# Altium PCB Brake_PCB.PcbDoc
Units mm, origin at the board's own origin, x right, y up, seen from the top; angles counter-clockwise.
Board outline 86.5 x 99 mm, 2 copper layers (Top Layer, Bottom Layer); 48 components, 47 nets, 244 pads, 44 vias.
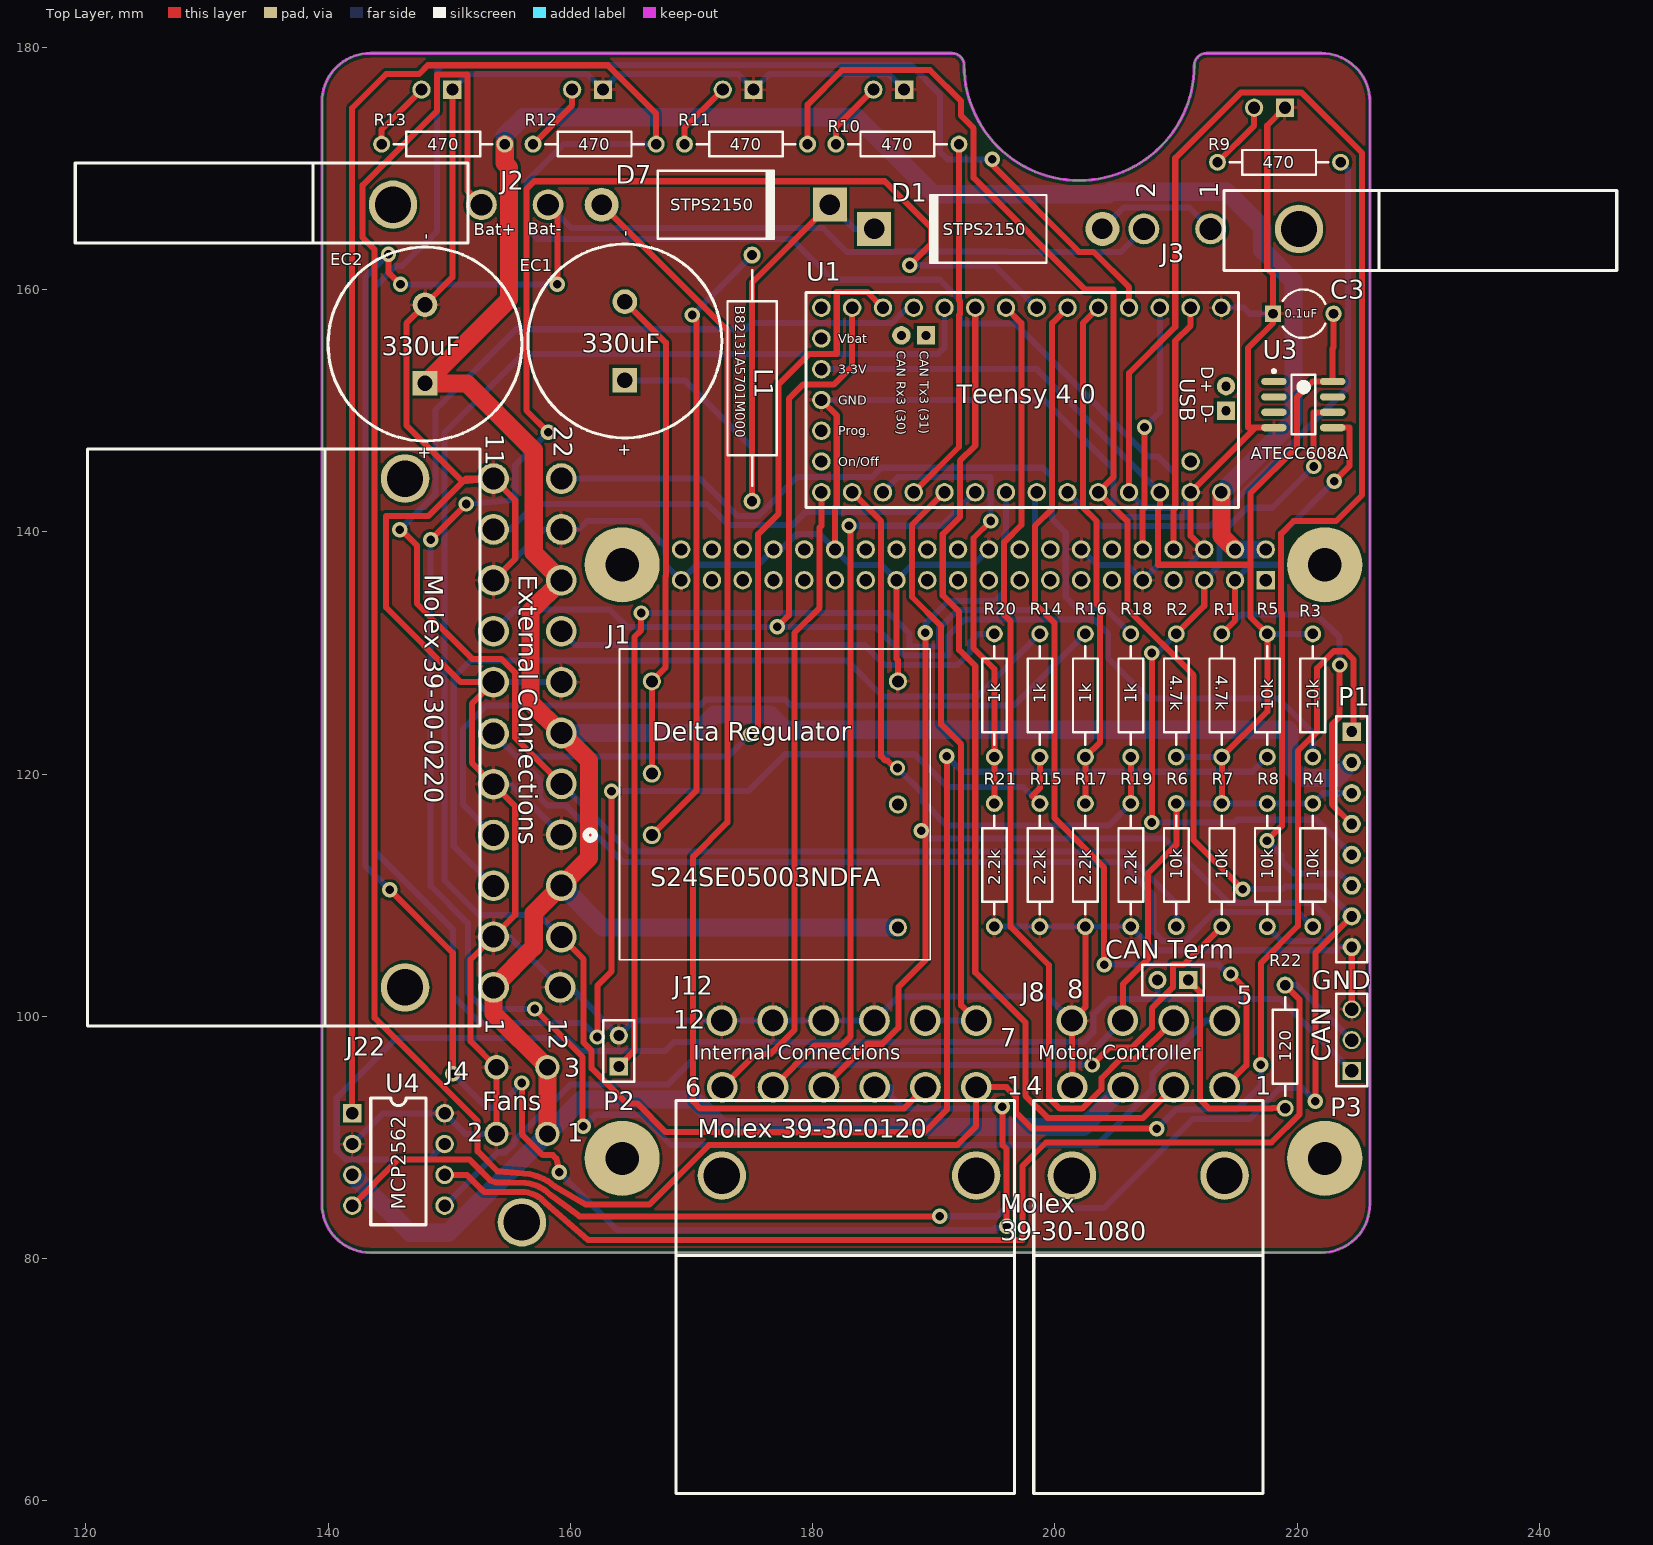
[diagram p0: Top Layer view]
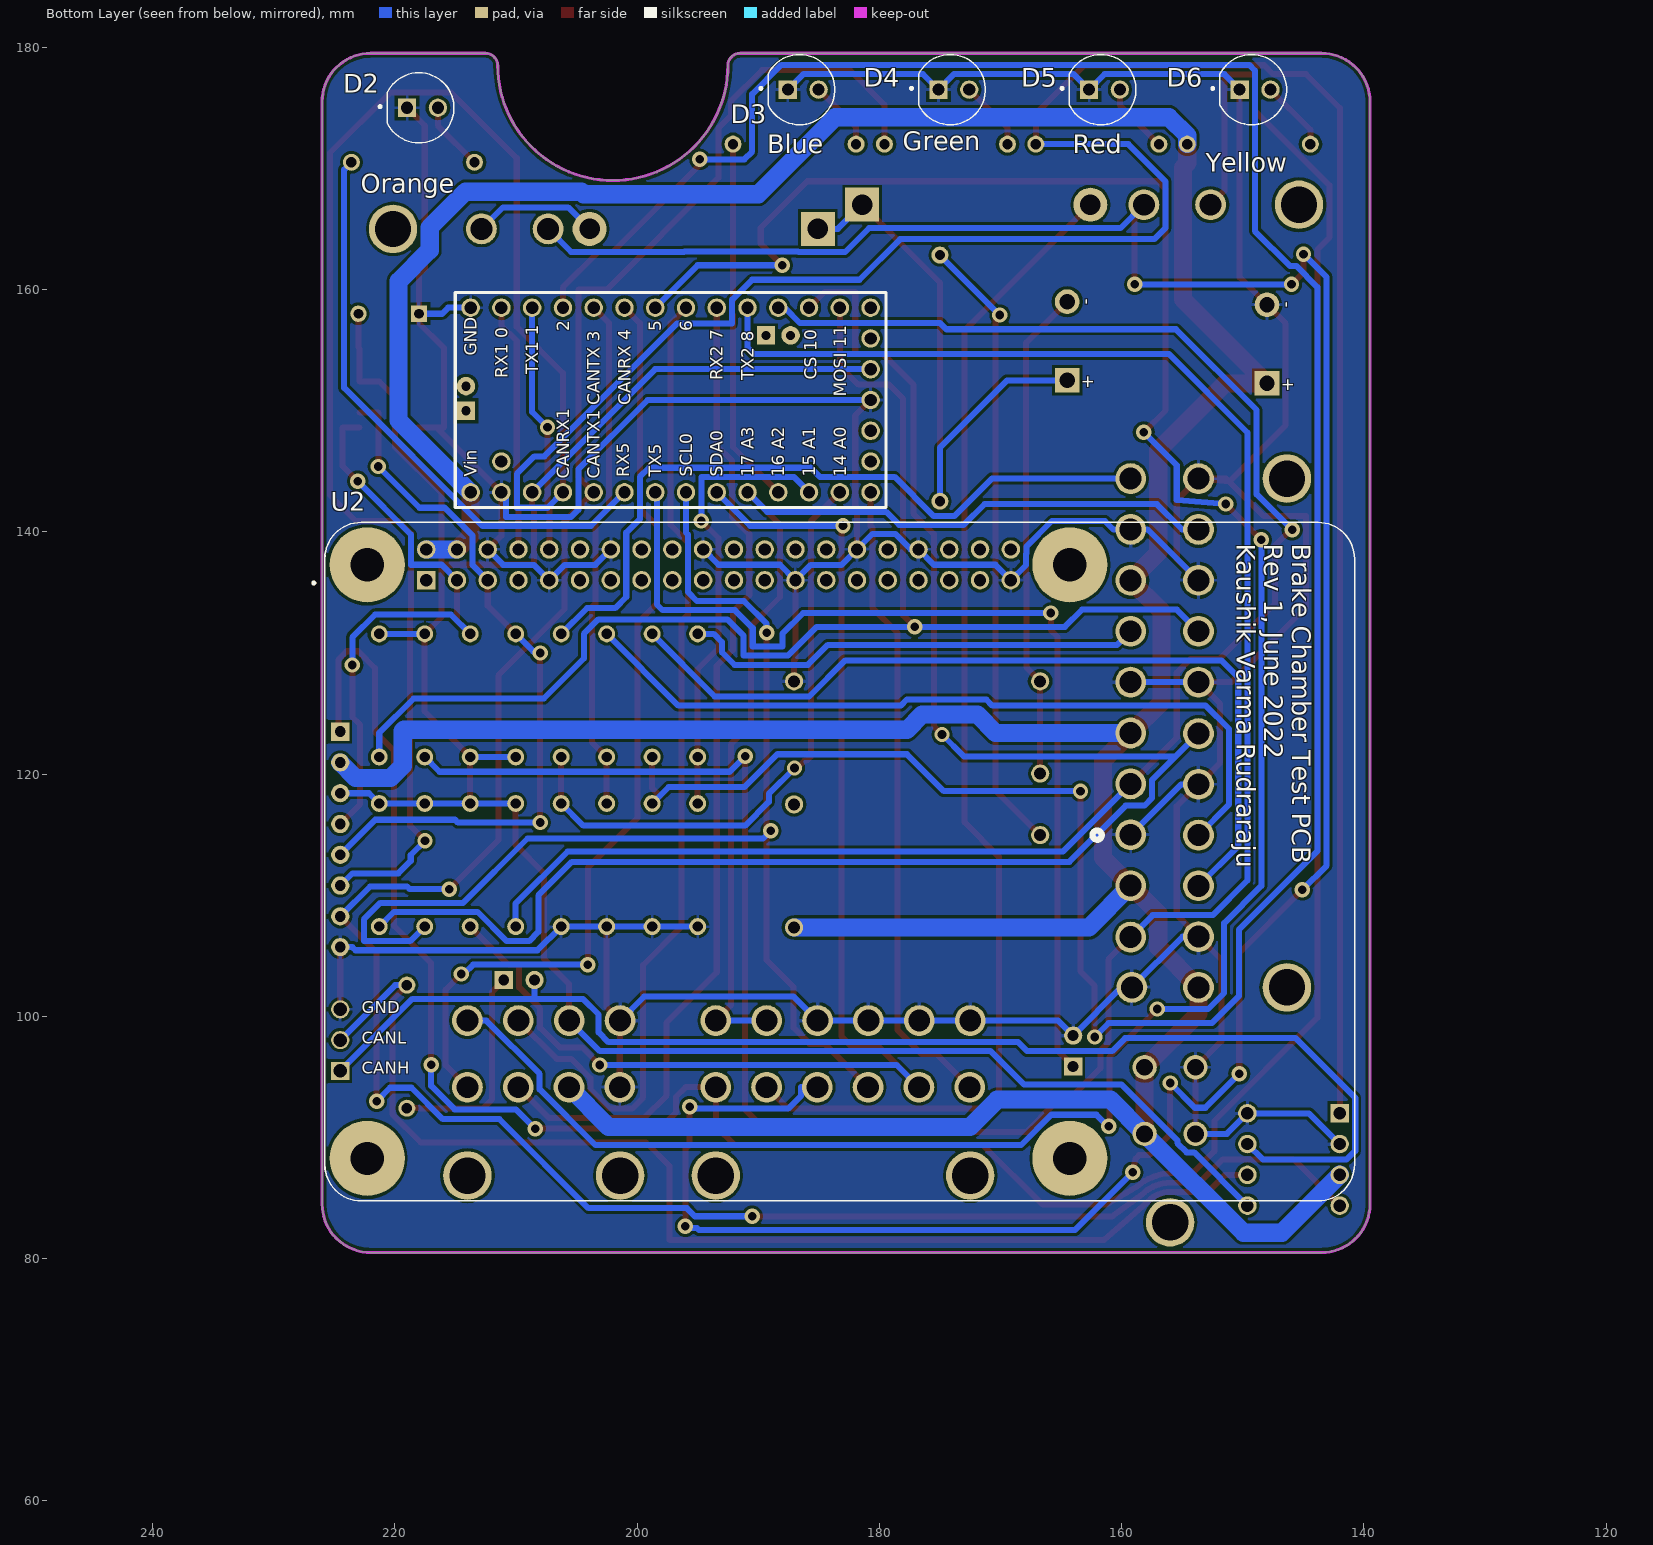
[diagram p1: Bottom Layer view, seen from below]

## Layer stack, top to bottom
Top Solder: solder mask 0.0102, Solder Resist, Dk 3.5
Top Layer: signal copper 0.0356
Dielectric 1: dielectric 0.32, FR-4, Dk 4.8
Bottom Layer: signal copper 0.0356
Bottom Solder: solder mask 0.0102, Solder Resist, Dk 3.5

## Board outline
139.5,84.5 139.5,175.5 cw(c143.5,175.5) 143.5,179.5 191.5,179.5 cw(c191.5,178.5) 192.5,178.5 ccw(c202,178.5) 211.5,178.5 cw(c212.5,178.5) 212.5,179.5 222,179.5 cw(c222,175.5) 226,175.5 226,84.504 225.996,84.504 cw(c221.996,84.504) 221.996,80.504 221.996,80.5 143.5,80.5 cw(c143.5,84.5)

## Design rules (kind name [scope] priority, off if disabled: settings)
Clearance [All] p1: gap=0.254 ignorepadtopadclearanceinfootprint=FALSE except(0: Arc-Hole Track-Hole SMDPad-Hole THPad-Hole Via-Hole Fill-Hole Poly-Hole Region-Hole Text-Hole)
PolygonConnect [All] p1: connectstyle=Relief reliefconductorwidth=0.254 reliefentries=4 polygonreliefangle="90 Angle" airgapwidth=0.254
RoutingVias [All] p1: holewidth=0.711 width=1.27 viastyle="Through Hole" minholewidth=0.711 minwidth=1.27 maxholewidth=0.711 maxwidth=1.27
SolderMaskExpansion [All] p1: expansion=0.102 istentingtop=FALSE
Width 5V [InNet('5V')] p1: maxlimit=2 minlimit=0.254 preferedwidth=1.5 minimp=50.000000 maximp=50.000000 favimp=50.000000
Width [All] p2: maxlimit=0.75 minlimit=0.4 preferedwidth=0.5 minimp=50.000000 maximp=50.000000 favimp=50.000000
30 further rules are at their usual default settings.

## Components (designator, comment, footprint, x,y, rotation, side; value= is the part's Value field where it differs from the comment)
C3 "0.1uF" CAPR5-4X5 220.5,158 r0 top
"CAN Term" "Header 2" HDR1X2 211,103 r180 top
D1 "STPS2150" DO-201AD 194.5,165 r180 top
D2 "Orange" LED_151054RS03000 217.715,175 r180 bottom
D3 "Blue" LED_151054RS03000 186.282,176.5 r180 bottom
D4 "Green" LED_151054RS03000 173.85,176.5 r180 bottom
D5 "Red" LED_151054RS03000 161.417,176.5 r180 bottom
D6 "Yellow" LED_151054RS03000 148.985,176.5 r180 bottom
D7 "STPS2150" DO-201AD 172,167 r0 top
EC1 "330uF" "Cap - 15mm Polarized" 164.5,155.75 r90 top
EC2 "330uF" "Cap - 15mm Polarized" 148,155.5 r90 top
J1 "S24SE05003NDFA" CONN6_3NDFA_DEA 166.723,114.96 r0 top
J2 "Battery Power" "2 pos Mini-Fit Jr. R/A Header" 152.66,167 r270 top
J3 "Motor Power" "2 pos Mini-Fit Jr. R/A Header" 212.845,165 r90 top
J4 "Fans" "4 POS MINI-FIT JR" 158.1,90.3 r0 top
J8 "Motor Controller" "8 pos Mini-Fit Jr. R/A Header" 214,94.155 r0 top
J12 "Internal Connections" "12 pos Mini-Fit Jr. R/A Header" 193.5,94.155 r0 top
J22 "External Connections" "22 pos Mini-Fit Jr. R/A Header" 153.655,102.391 r270 top
L1 "B82131A5701M000" AXIAL-0.8 175,152.684 r270 top
P1 "Header 8" HDR1X8 224.5,123.5 r270 top
P2 "Header 2" HDR1X2 164,95.87 r90 top
P3 "Header 3" HDR1X3 224.5,95.5 r90 top
R1 "4.7k" AXIAL-0.4 213.773,126.494 r270 top value=10K
R2 "4.7k" AXIAL-0.4 210.019,126.494 r270 top value=10K
R3 "10k" AXIAL-0.4 221.283,126.494 r90 top value="10 K"
R4 "10k" AXIAL-0.4 221.283,112.494 r90 top value="10 K"
R5 "10k" AXIAL-0.4 217.528,126.494 r90 top value="10 K"
R6 "10k" AXIAL-0.4 210.019,112.494 r90 top value="10 K"
R7 "10k" AXIAL-0.4 213.773,112.494 r90 top value="10 K"
R8 "10k" AXIAL-0.4 217.528,112.494 r90 top value="10 K"
R9 "470" AXIAL-0.4 218.5,170.5 r0 top value="470 R"
R10 "470" AXIAL-0.4 187,172 r0 top value="470 R"
R11 "470" AXIAL-0.4 174.5,172 r0 top value="470 R"
R12 "470" AXIAL-0.4 162,172 r0 top value="470 R"
R13 "470" AXIAL-0.4 149.5,172 r0 top value="470 R"
R14 "1k" AXIAL-0.4 198.755,126.494 r90 top value=1K
R15 "2.2k" AXIAL-0.4 198.755,112.494 r90 top value="2.2 K"
R16 "1k" AXIAL-0.4 202.509,126.494 r90 top value=1K
R17 "2.2k" AXIAL-0.4 202.509,112.494 r90 top value="2.2 K"
R18 "1k" AXIAL-0.4 206.264,126.494 r90 top value=1K
R19 "2.2k" AXIAL-0.4 206.264,112.494 r90 top value="2.2 K"
R20 "1k" AXIAL-0.4 195,126.494 r90 top value=1K
R21 "2.2k" AXIAL-0.4 195,112.494 r90 top value="2.2 K"
R22 "120" AXIAL-0.4 219,97.5 r90 top
U1 "Teensy 4.0" "Teensy 4.0" 180.72,158.5 r270 top
U2 "RASPBERRYPI4_4GB" MODULE_RASPBERRYPI4_4GB 183.275,112.775 r180 bottom locked
U3 "ATECC608A" SOIC-8 220.5,150.5 r0 top
U4 "MCP2562" DIP8 141.999,92 r0 top

## Footprints (in the part's own frame and the unit in brackets; to place one, negate y for a bottom-side part, rotate by r counter-clockwise, add the part's x,y. Pads: shape width x height; smd on the part's side, far side on the other; paste and mask are expansions set on the pad)
"2 pos Mini-Fit Jr. R/A Header" [mm] "Molex 2 position Mini-Fit Jr. Right Angle Header with Pegs, Series 5569"
  round 4 hole 3: 0(0,-7.3)
  round 2.54 hole 1.803: 1(0,0) 2(0,5.5)
  silkscreen extent -3.43,-33.53 3.17,-1.1
"4 POS MINI-FIT JR" [mm] "Vertical Header"
  round 4 hole 3: 0(-2.1,-7.3)
  round 2 hole 1.4: 1(0,0) 2(-4.2,0) 3(0,5.5) 4(-4.2,5.5)
"8 pos Mini-Fit Jr. R/A Header" [mm] "Molex 8 position Mini-Fit Jr. Right Angle Header with Pegs, Series 5569"
  round 4 hole 3: 0(-12.6,-7.3) 0(0,-7.3)
  round 2.54 hole 1.803: 1(0,0) 2(-4.191,0) 3(-8.382,0) 4(-12.573,0) 5(0,5.5) 6(-4.2,5.5) 7(-8.4,5.5) 8(-12.6,5.5)
  silkscreen extent -15.75,-33.53 3.17,-1.1
"12 pos Mini-Fit Jr. R/A Header" [mil] "Molex 12 position Mini-Fit Jr. Right Angle Header with Pegs, Series 5569"
  round 157.48 hole 118.11: 0(-826.77,-287.4) 0(0,-287.4)
  round 100 hole 71: 1(0,0) 2(-165,0) 3(-330,0) 4(-495,0) 5(-660,0) 6(-825,0) 7(0,216.54) 8(-165.35,216.54) 9(-330.71,216.54) 10(-496.06,216.54) 11(-661.42,216.54) 12(-826.77,216.54)
  silkscreen extent -975,-1320 125,-43
"22 pos Mini-Fit Jr. R/A Header" [mil] "Molex 22 position Mini-Fit Jr. Right Angle Header with Pegs, Series 5569"
  round 157.48 hole 118.11: 0(-1653.54,-287.4) 0(0,-287.4)
  round 100 hole 71: 1(0,0) 2(-165,0) 3(-330,0) 4(-495,0) 5(-660,0) 6(-825,0) 7(-992.12,0) 8(-1157.48,0) 9(-1322.83,0) 10(-1488.19,0) 11(-1653.54,0) 12(0,216.54) 13(-163.58,220.47) 14(-330.71,220.47) 15(-496.06,220.47) 16(-661.42,220.47) 17(-826.77,220.47) 18(-992.12,220.47) 19(-1157.48,220.47) 20(-1322.83,220.47) 21(-1488.19,220.47) 22(-1653.54,220.47)
  silkscreen extent -1750,-1320 125,-43
AXIAL-0.4 [mm] "Axial Device, Thru-Hole; 2 Leads; 0.4 in Pin Spacing"
  round 1.4 hole 0.85: 1(-5.08,0) 2(5.08,0)
  silkscreen extent -4.06,-1.02 4.06,1.02
AXIAL-0.8 [mm] "Axial Device, Thru-Hole; 2 Leads; 0.8 in Pin Spacing"
  round 1.4 hole 0.85: 1(-10.16,0) 2(10.16,0)
  silkscreen extent -8.89,-2.03 8.89,2.03
"Cap - 15mm Polarized" [mil] "15 MM DIA ALUMINUM ELECTROLYTIC CAPACITOR w/ 7.5mm hole spacing"
  rect 80x80 hole 50: 1(-127.95,0)
  round 80 hole 50: 2(127.95,0)
  silkscreen extent -315,-315 315,315
CAPR5-4X5 [mm] "Capacitor; 2 Leads"
  rect 1.35x1.35 hole 0.8: 1(-2.5,0)
  round 1.35 hole 0.8: 2(2.5,0)
  silkscreen extent -1.69,-2 1.82,2
CONN6_3NDFA_DEA [mil]
  round 59 hole 39: 1(0,0) 2(0,200) 3(0,500) 4(800,500) 5(800,100) 6(800,-300)
  silkscreen extent -215,-405 905,605, body extent 0,0 10,10, height 10
DIP8 [mil]
  rect 60x60 hole 40: 1(0,0)
  round 60 hole 40: 2(0,-100) 3(0,-200) 4(0,-300) 5(300,-300) 6(300,-200) 7(300,-100) 8(300,0)
  silkscreen extent 60,-362 240,50
DO-201AD [mm] "Diode, Axial; Body 9.5 x 5.6 mm (LxDia. max), Lead Dia. 1.32 mm (max)"
  round 2.8 hole 1.7: 1(-9.42,0)
  rect 2.8x2.8 hole 1.7: 2(9.42,0)
  silkscreen extent -4.8,-2.8 4.9,2.8
HDR1X2 [mm] "Connector; Header; 2 Position"
  rect 1.5x1.5 hole 0.9: 1(0,0)
  round 1.5 hole 0.9: 2(2.54,0)
  silkscreen extent -1.27,-1.27 3.81,1.27
HDR1X3 [mm] "Connector; Header; 3 Position"
  rect 1.5x1.5 hole 1.1: 1(0,0)
  round 1.5 hole 1.1: 2(2.54,0) 3(5.08,0)
  silkscreen extent -1.27,-1.27 6.35,1.27
HDR1X8 [mm] "Connector; Header; 8 Position"
  rect 1.5x1.5 hole 0.9: 1(0,0)
  round 1.5 hole 0.9: 2(2.54,0) 3(5.08,0) 4(7.62,0) 5(10.16,0) 6(12.7,0) 7(15.24,0) 8(17.78,0)
  silkscreen extent -1.27,-1.27 19.05,1.27
LED_151054RS03000 [mm]
  round 1.508 hole 1: A(1.27,0)
  rect 1.508x1.508 hole 1: C(-1.27,0)
  silkscreen extent -3.6,-2.9 2.6,2.9
MODULE_RASPBERRYPI4_4GB [mil]
  rect 60x60 hole 40: 1(-1343.7,914.57)
  round 60 hole 40: 2(-1343.7,1014.57) 3(-1243.7,914.57) 4(-1243.7,1014.57) 5(-1143.7,914.57) 6(-1143.7,1014.57) 7(-1043.7,914.57) 8(-1043.7,1014.57) 9(-943.7,914.57) 10(-943.7,1014.57) 11(-843.7,914.57) 12(-843.7,1014.57) 13(-743.7,914.57) 14(-743.7,1014.57) 15(-643.7,914.57) 16(-643.7,1014.57) 17(-543.7,914.57) 18(-543.7,1014.57) 19(-443.7,914.57) 20(-443.7,1014.57) 21(-343.7,914.57) 22(-343.7,1014.57) 23(-243.7,914.57) 24(-243.7,1014.57) 25(-143.7,914.57) 26(-143.7,1014.57) 27(-43.7,914.57) 28(-43.7,1014.57) 29(56.3,914.57) 30(56.3,1014.57) 31(156.3,914.57) 32(156.3,1014.57) 33(256.3,914.57) 34(256.3,1014.57) 35(356.3,914.57) 36(356.3,1014.57) 37(456.3,914.57) 38(456.3,1014.57) 39(556.3,914.57) 40(556.3,1014.57)
  round 244.09 hole 108.27: S1(-1535.43,964.57) S2(748.03,964.57) S3(748.03,-964.56) S4(-1535.43,-964.56)
  silkscreen extent -1713,-1102 1673,1102
SOIC-8 [mm]
  oval 2.1x0.6 smd: 1(-2.425,1.905) 2(-2.425,0.635) 3(-2.425,-0.635) 4(-2.425,-1.905) 5(2.425,-1.905) 6(2.425,-0.635) 7(2.425,0.635) 8(2.425,1.905)
  silkscreen extent -2.55,-2.45 0.97,2.88
"Teensy 4.0" [mil] "32 bit Arduino Compatible Microcontroller www.pjrc.com/teensy"
  round 60 hole 40: 0(0,1200) 1(0,1100) 2(0,1000) 3(0,900) 3V3a(600,1100) 3V3b(200,0) 4(0,800) 5(0,700) 6(0,600) 7(0,500) 8(0,400) 9(0,300) 10(0,200) 11(0,100) 12(0,0) 13(600,0) 14(600,100) 15(600,200) 16(600,300) 17(600,400) 18(600,500) 19(600,600) 20(600,700) 21(600,800) 22(600,900) 23(600,1000) G1(0,1300) G2(600,1200) G3(300,0) On(500,0) P(400,0) VBat(100,0) Vin(600,1300) VUSB(500,1200)
  round 60 hole 30: CRX3(90,260) D+(255,1315)
  rect 60x60 hole 30: CTX3(90,340) D-(335,1315)
  silkscreen extent -50,-50 650,1355

## Part data
C3: library part Cap, "Capacitor"
"CAN Term" P2: "Header, 2-Pin"
  "CAN Term": LatestRevisionDate=17-Jul-2002, LatestRevisionNote="Re-released for DXP Platform.", Publisher="Altium Limited"
D1 D7: library part "Diode 1N5408", "DIODE SCHOTTKY 150V 2A DO15"
D2 D3 D4 D5 D6: library part 151054RS03000, "Red 623nm LED Indication - Discrete 1.9V Radial"
EC1 EC2: library part "Capacitor, Polarized", "CAP ALUM 220UF 20% 100V RADIAL", Manufacturer=Nichicon, PartNumber=UBT2A221MHD1TN, Supplier Part Number 1=493-4517-1-ND, Supplier 1=Digi-Key
J1: "No Description Available", PartNumber=S24SE05003NDFA
J2 J3: library part "2 Pos Header", Manufacturer="Voltage IN", PartNumber=39-30-1020, Supplier Part Number 1=538-39-30-1020, Supplier 1=Mouser
J4: library part "4 Pos Header Vert", "CONN HEADER 4POS 4.2MM VERT TIN", Manufacturer="Molex Exhaust fans", PartNumber=39-29-9040, Supplier 1=Digi-Key
J8: library part "8 Pos Header", "CONN HEADER 8POS 4.2MM R/A TIN", Manufacturer=Molex, PartNumber=39-30-1080, Supplier Part Number 1=WM21354-ND, Supplier 1=Digi-Key
J12: library part "12 Pos Header", Manufacturer=Molex, PartNumber=39-30-1120, Supplier 1=Digi-Key
J22: library part "22 Pos Header", Manufacturer=Molex, PartNumber=39-30-1220, Supplier 1=Digi-Key
L1: library part 8230-20-RC, "14 µH Unshielded Drum Core, Wirewound Inductor 700 mA 760mOhm Axial", PartNumber=8230-20-RC
P1: "Header, 8-Pin"
P3: "Header, 3-Pin", LatestRevisionDate=17-Jul-2002, LatestRevisionNote="Re-released for DXP Platform.", Publisher="Altium Limited"
R1 R2 R3 R4 R5 R6 R7 R8 R9 R10 R11 R12 R13 R14 R15 R16 R17 R18 R19 R20 R21 R22: library part Res1, "Resistor"
U1: library part Teensy_4.0, "32 Bit Arduino-Compatible iMX Microcontroller", Manufacturer=PRJC, Supplier Part Number 1=1568-DEV-15583-ND, PartNumber="Teensy 4.0", Supplier 1=Digi-Key
U2: "BCM2711 Raspberry Pi 4 Model B 4GB - ARMÂ® CortexÂ®-A72 MPU Embedded Evaluation Board"
U3: library part ATECC508A, "Authentication Chip IC Networking and Communications 8-SOIC", Manufacturer="Microchip Technology", PartNumber=ATECC508A-SSHDA-T, Supplier Part Number 1=ATECC508A-SSHDA-TCT-ND, Supplier 1=Digi-Key
U4: library part MCP2551, Supplier 1=Digi-Key

## Via types
v1: diameter 1.27, hole 0.711, Top Layer to Bottom Layer, 44 vias

## Nets (pads, with @x,y where several pads share a name; then routed paths per layer and width w, separated by ;. In a path a pad name is that pad's centre, name@x,y a point inside that pad or via, vN(x,y) a via of type N, cw(c..) or ccw(c..) an arc to the next point about the centre after c; other vN are vias at no path point)
3V3: C3.2 J8.7 P1.3 R1.2 R2.2 R3.2 R4.2 R5.2 R6.2 R7.2 R8.2 U1.3V3a U1.3V3b U3.8 U4.5 | length 196.7
  Top Layer w0.5: J8.7 205.6,102.654 207.696,104.75 207.696,111.836 210.019,114.159 R6.2 ; U1.3V3a 208.66,142.029 208.515,141.884 208.515,137.279 216.135,137.279 ; R7.2 R1.2 217.528,125.169 R5.2 216.135,132.967 216.135,137.279 ; C3.2 223,155.218 222.925,155.143 U3.8 221.264,152.405 219.989,151.13 219.989,147.015 216.135,143.161 216.135,137.279
  Bottom Layer w0.5: U4.5 154.013,88.773 154.635,88.773 155.397,89.535 155.397,89.764 160.021,94.387 168.072,94.387 170.812,97.127 203.072,97.127 J8.7 ; U1.3V3b 198.5,153.42 U1.3V3a ; R6.2 R7.2 R8.2 R4.2 222.128,118.42 P1.3 ; R2.2 R1.2 ; R5.2 R3.2
5V: EC2.1 J1.6 J4.1 J4.3 J8.3 J22.1 J22.14 J22.17 J22.20 P1.2 R13.2 U1.Vin U2.2 U2.4 U4.3 | length 372.4
  Top Layer w1.5: R13.2 154.58,170.434 154.94,170.074 154.94,159.19 EC2.1 151.46,152.25 156.972,146.738 156.972,138.274 J22.20 156.718,133.454 156.718,125.928 J22.17 161.544,121.102 161.544,113.08 J22.14 156.972,108.508 156.972,105.708 J22.1 153.655,100.245 J4.3 J4.1 ; U1.Vin 213.74,139.67 U2.4
  Bottom Layer w1.5: U4.3 146.776,82.144 149.944,82.144 J4.1 160.933,93.133 170.265,93.133 172.517,90.881 202.344,90.881 J8.3 ; R13.2 154.58,172.72 156.079,174.219 183.642,174.219 189.992,167.869 204.394,167.869 204.597,168.072 214.147,168.072 217.119,165.1 217.119,163.246 219.685,160.68 219.685,149.205 U1.Vin ; J22.14 162.706,107.34 J1.6 ; J22.17 170.394,123.391 171.908,124.905 176.467,124.905 177.717,123.655 219.245,123.655 219.337,123.563 219.337,120.693 220.345,119.685 223.225,119.685 P1.2 ; U2.4 U2.2
"Bat  -": EC1.2 J1.2 J1.3 | length 40.9
  Top Layer w0.5: EC1.2 167.879,155.621 167.879,138.021 167.894,138.005 167.894,136.373 167.869,136.347 167.869,128.806 J1.3 J1.2
"Bat +": J2.1 J12.1 P1.1 | length 231
  Top Layer w0.5: J2.1 151.513,168.147 151.513,177.758 148.997,177.758 148.997,174.752 142.85,168.605 142.85,164.287 143.84,163.297 143.84,99.873 152.349,91.364 152.349,88.849 153.984,87.214 156.631,87.006 157.187,86.832 cw(c156,83) 158.684,85.982 161.294,84.453 166.521,84.453 171.45,89.383 191.948,89.383 193.5,90.935 J12.1 195.985,94.155 196.795,93.345 196.795,92.054 198.12,90.729 v1(208.407,90.729) ; v1(217,96) 217,104.402 220.066,107.467 220.066,121.92 221.646,123.5 221.646,128.756 223.028,130.139 223.972,130.139 224.639,129.472 224.639,123.639 P1.1
  Bottom Layer w0.5: v1(208.407,90.729) 210.007,92.329 215.062,92.329 217,94.267 v1(217,96)
"Bat -": J2.2 J3.2 J12.3 | length 223.4
  Top Layer w0.5: v1(144.983,162.916) 144.983,161.417 v1(145.974,160.426) ; v1(145.085,110.439) 150.292,105.232 v1(150.292,95.25) ; v1(156,94.5) 156,90.273 157.734,88.539 158.552,88.539 158.845,88.246 v1(159.091,87.121) ; J2.2 158.928,166.232 v1(158.928,160.426) ; v1(195.656,92.532) 195.656,89.408 196.012,89.052 v1(196.012,82.677)
  Bottom Layer w0.5: v1(144.983,162.916) 143.078,161.011 143.078,112.446 v1(145.085,110.439) ; v1(145.974,160.426) v1(158.928,160.426) ; v1(150.292,95.25) 153.086,92.456 153.956,92.456 v1(156,94.5) ; J2.2 160.085,165.075 180.848,165.075 182.827,163.096 186.689,163.096 186.732,163.139 196.065,163.139 196.108,163.096 205.441,163.096 J3.2 ; v1(159.091,87.121) 163.861,82.351 194.883,82.351 195.062,82.53 195.864,82.53 v1(196.012,82.677) ; J12.3 186.461,94.155 186.461,93.447 187.528,92.38 195.504,92.38 v1(195.656,92.532)
Blue: R10.2 U1.16 | length 30.3
  Top Layer w0.5: U1.16 192.08,147 192.08,157.91 192.146,157.976 192.146,159.024 192.08,159.09 R10.2
CANH: "CAN Term.2" P3.1 U4.7 | length 107
  Bottom Layer w0.5: U4.7 148.348,88.189 141.427,88.189 140.716,88.9 140.716,93.269 145.644,98.196 159.715,98.196 160.782,97.13 167.792,97.13 168.544,97.881 202.367,97.881 203.175,98.688 203.175,100.152 204.47,101.448 208.46,101.448 ; 208.46,103 208.46,101.448 ; P3.1 218.552,101.448 208.46,101.448
CANL: P3.2 R22.2 U4.6 | length 99
  Top Layer w0.5: U4.6 151.459,86.92 152.729,85.65 152.875,85.504 156,85.504 cw(c156,83) 157.786,84.755 ccw(c158.319,85.288) 157.787,84.755 157.923,84.618 161.45,81.534 161.657,81.534 197.333,81.534 197.333,87.655 199.263,89.586 217.868,89.586 220.204,91.921 220.204,101.376 R22.2
  Bottom Layer w0.5: R22.2 219.96,102.58 P3.2
"Displacement Reset": J12.6 U1.13 | length 53.2
  Top Layer w0.5: J12.6 175.291,96.901 176.53,96.901 178.486,98.857 178.486,131.648 180.575,133.737 180.575,140.335 180.72,140.48 U1.13
"Encoder A": R14.1 R15.2 U1.2 | length 227.9
  Top Layer w0.5: v1(162.23,98.298) 162.23,102.54 163.398,103.708 v1(163.398,118.593) ; v1(194.818,170.739) 194.818,170.284 202.006,163.096 203.2,163.096 206.12,160.176 U1.2 ; R15.2 198.12,118.209 198.755,118.843 R14.1
  Bottom Layer w0.5: v1(162.23,98.298) 161.087,99.441 152.552,99.441 150.317,101.676 150.317,107.163 143.84,113.64 143.84,160.198 145.588,161.945 146.118,161.945 148.996,164.823 148.996,178.079 149.454,178.537 188.087,178.537 190.5,176.124 190.5,171.374 191.135,170.739 v1(194.818,170.739) ; v1(163.398,118.593) 174.676,118.593 177.722,121.639 188.419,121.639 191.135,118.923 197.406,118.923 R15.2
"Encoder A IN": J22.3 R14.2 | length 70.9
  Bottom Layer w0.5: J22.3 150.373,114.055 150.373,127.996 151.765,129.388 182.808,129.388 185.789,126.407 193.587,126.407 R14.2
"Encoder B": R16.1 R17.2 U1.3 | length 42.5
  Top Layer w0.5: R17.2 R16.1 203.733,122.638 203.733,133.756 203.435,134.055 203.435,140.894 202.311,142.018 202.311,157.231 U1.3
"Encoder B IN": J22.4 R16.2 | length 64.9
  Bottom Layer w0.5: J22.4 151.127,117.492 151.127,123.72 153.059,125.653 170.665,125.653 171.172,126.159 177.721,126.159 178.228,125.653 196.588,125.653 R16.2
Extra: P2.1 U1.20 | length 84.2
  Top Layer w0.5: P2.1 165.278,97.148 165.278,131.318 165.837,131.877 v1(165.837,133.299)
  Bottom Layer w0.5: v1(165.837,133.299) 186.294,133.299 187.98,131.613 187.98,130.531 190.449,130.531 190.449,132.047 191.935,133.532 197.898,133.532 198.351,133.985 198.351,139.802 198.349,139.804 198.349,143.26 U1.20
GND: C3.1 D2.C D3.C D4.C D5.C D6.C EC2.2 J1.4 J4.2 J4.4 J8.4 J8.8 J12.9 J12.10 J12.11 J12.12 J22.2 J22.5 J22.7 J22.9 J22.11 J22.12 J22.15 J22.18 J22.21 P1.8 P2.2 P3.3 R15.1 R17.1 R19.1 R21.1 U1.G1 U1.G2 U1.G3 U2.6 U2.9 U2.14 U2.20 U2.25 U2.30 U2.34 U2.39 U3.4 U4.2 U4.8 | length 458.2
  Top Layer w0.5: D6.C 150.255,161.005 EC2.2 146.456,157.207 146.456,148.793 151.117,144.132 ; J22.9 155.448,137.784 155.448,142.598 J22.11 ; J4.2 J4.4 151.765,97.935 151.765,104.692 J22.2 155.448,108.375 155.448,117.362 J22.5 151.867,120.943 151.867,125.803 J22.7 150.945,127.591 144.784,133.752 144.784,141.296 148.281,141.296 151.117,144.132 ; U1.G3 181.991,149.609 181.991,142.132 181.845,141.986 U2.30 ; U2.25 186.925,129.517 187.043,129.4 J1.4 ; J8.4 201.427,96.876 201.4,96.903 J8.8 202.509,100.764 R17.1 ; U2.6 211.2,139.67 U1.G2 216.535,148.595 ; U3.4 216.535,148.595 ; D2.C 217.526,173.541 217.526,161.714 218,161.239 C3.1 218,157.226 215.951,155.177 215.951,148.595 216.535,148.595 ; P3.3 224.5,103.149 ; 224.5,103.15 P1.8 ; 151.117,144.132 151.376,144.391 J22.11 ; 151.117,144.132 J22.11
  Bottom Layer w0.5: U4.2 144.54,92 U4.8 151.319,90.3 J4.2 ; D6.C 151.529,177.775 161.413,177.775 D5.C 163.962,177.775 173.845,177.775 D4.C 176.394,177.775 186.278,177.775 D3.C ; J22.2 154.964,106.582 J22.12 160.019,102.391 P2.2 165.245,99.655 J12.12 J12.11 J12.10 J12.9 187.075,101.63 199.425,101.63 J8.8 ; J22.5 155.091,119.155 J22.15 ; J22.7 J22.18 ; J22.9 157.855,140.191 J22.21 160.68,140.191 161.383,140.894 165.753,140.894 167.869,138.778 167.869,138.201 167.894,138.176 167.894,137.256 U2.39 170.419,137.279 175.499,137.279 U2.34 177.407,138.545 178.689,139.827 180.563,139.827 U2.30 183.115,137.275 185.655,137.275 U2.25 188.199,137.279 193.279,137.279 U2.20 ; U1.G3 199.132,150.88 204.851,145.161 204.851,141.816 205.435,141.232 210.82,141.232 210.82,142.88 U1.G2 ; R21.1 R15.1 R17.1 R19.1 208.222,105.456 223.241,105.456 223.504,105.72 P1.8 ; U2.14 203.435,137.275 205.975,137.275 U2.9 208.515,137.275 211.055,137.275 U2.6 ; U1.G1 215.595,158.5 216.095,158 C3.1
Green: R9.2 U1.21 | length 47.9
  Bottom Layer w0.5: U1.21 203.822,140.478 212.766,140.478 224.18,151.892 224.18,169.9 R9.2
"Limit Apply": J22.13 R5.1 U1.8 | length 196.8
  Top Layer w0.5: J22.13 161.091,104.71 161.091,97.826 161.754,97.163 161.754,95.7 164.643,92.812 165.506,92.812 167.869,90.449 189.23,90.449 191.084,92.304 v1(191.084,121.463)
  Bottom Layer w0.5: J22.13 157.445,108.356 152.476,108.356 149.619,111.214 149.619,148.197 156.112,154.69 190.377,154.69 190.88,155.193 U1.8 ; v1(191.084,121.463) 192.354,120.193 216.307,120.193 R5.1
"Limit Apply Safety": J22.8 R3.1 U1.11 | length 109.6
  Top Layer w0.5: v1(177.089,132.156) 178.031,133.098 178.031,150.978 179.199,152.146 181.736,152.146 183.26,153.67 U1.11
  Bottom Layer w0.5: J22.8 155.443,133.579 163.271,133.579 164.694,132.156 v1(177.089,132.156) 185.166,132.156 187.546,129.777 191.203,129.777 191.203,131.431 192.55,132.778 203.188,132.778 204.394,131.572 204.394,129.54 207.696,126.238 218.44,126.238 221.283,123.395 R3.1
"Limit Retract": J22.16 R6.1 U1.9 | length 138.8
  Top Layer w0.5: v1(145.923,140.157) 146.05,140.157 147.324,138.883 147.324,134.083 151.892,129.515 154.305,129.515 155.448,128.372 155.448,122.998 J22.16
  Bottom Layer w0.5: v1(145.923,140.157) 148.859,143.093 148.859,150.053 155.524,156.718 174.473,156.718 174.985,157.23 186.55,157.23 187.82,158.5 U1.9 ; J22.16 164.843,113.603 205.74,113.603 210.019,109.324 R6.1
"Limit Retract Safety": J22.6 R4.1 U1.10 | length 144.1
  Top Layer w0.5: v1(174.828,123.266) 175.499,123.937 175.499,139.802 177.19,141.493 177.19,152.171 179.713,154.694 181.991,154.694 181.991,159.791 184.509,159.791 U1.10
  Bottom Layer w0.5: J22.6 155.538,121.463 ; v1(174.828,123.266) 173.025,121.463 155.538,121.463 ; R4.1 220.079,108.618 217.029,108.618 217.018,108.607 214.716,108.607 214.705,108.618 213.165,108.618 210.757,106.21 208.915,106.21 208.153,106.972 208.153,109.982 205.384,112.751 164.313,112.751 159.664,117.399 158.115,117.399 157.48,118.034 157.48,119.521 155.538,121.463
"Limit Stop": J12.7 J12.8 J22.10 U1.17 | length 91
  Top Layer w0.5: U1.17 188.199,140.579 188.199,134.62 190.602,132.217 190.602,124.104 192.253,122.453 192.253,100.902 J12.7
  Bottom Layer w0.5: J22.10 155.003,140.191 157.103,142.291 171.317,142.291 173.042,140.566 178.362,140.566 179.435,141.639 189.259,141.639 U1.17 ; J12.8 J12.7
"Motor Apply": J12.5 R7.1 U1.18 | length 106.5
  Top Layer w0.5: J12.5 180.187,97.606 182.391,97.606 183.119,98.334 183.119,140.381 v1(183,140.5) ; v1(203.073,95.987) 204.521,97.434 206.375,97.434 208.001,99.06 208.001,100.66 209.728,102.387 209.728,104.267 210.626,104.267 R7.1
  Bottom Layer w0.5: J12.5 178.568,95.987 v1(203.073,95.987) ; v1(183,140.5) 190.66,140.5 U1.18
"Motor Controller AN1": J8.5 U1.5 | length 202.3
  Top Layer w0.5: v1(148.463,139.344) v1(151.409,142.291) ; v1(157.048,100.609) 161,96.658 161,91 v1(161.059,90.941) ; v1(158.166,148.209) 156.362,150.012 156.362,168.275 157.023,168.935 185.953,168.935 189.789,165.1 189.789,163.789 v1(188,162)
  Bottom Layer w0.5: v1(148.463,139.344) 148.463,110.769 151.536,107.696 151.536,101.93 152.857,100.609 v1(157.048,100.609) ; v1(151.409,142.291) 155.448,142.621 155.448,145.491 v1(158.166,148.209) ; v1(161.059,90.941) 161.142,90.941 162.08,91.879 165.39,91.879 165.804,91.879 168.3,89.383 203.438,89.383 208.035,93.98 208.035,95.25 212.44,99.655 J8.5 ; v1(188,162) 195,162 U1.5
"Motor Controller AN2": J8.6 U1.6 | length 82.1
  Top Layer w0.5: U1.6 197.231,157.229 197.231,140.564 195.811,139.144 195.811,133.147 196.342,132.616 196.342,107.391 199.492,104.242 199.492,93.294 200.405,92.381 202.245,92.381 203.844,93.98 203.844,94.89 205.449,96.495 206.64,96.495 J8.6
"Motor Controller IN1": J8.1 U1.4 | length 79.1
  Top Layer w0.5: U1.4 199.771,157.231 199.771,141.91 198.351,140.49 198.351,134.087 199.974,132.463 199.974,116.357 204.064,112.268 v1(204.064,104.267) ; J8.1 215.798,95.953 215.798,102.202 v1(214.5,103.5)
  Bottom Layer w0.5: v1(204.064,104.267) 213.525,104.267 214.292,103.5 v1(214.5,103.5)
"Motor Controller IN2": J8.2 U1.7 | length 83
  Top Layer w0.5: U1.7 193.42,147.116 192.151,145.847 192.151,141.214 190.739,139.802 190.739,134.747 192.088,133.398 192.088,130.263 193.421,128.93 193.421,103.632 197.552,99.501 197.552,93.456 199.39,91.618 207.272,91.618 J8.2
"Motor Retract": J12.4 R8.1 U1.19 | length 102.8
  Top Layer w0.5: J12.4 184.511,97.739 185.75,97.739 187.071,99.06 187.071,102.413 189.306,104.648 v1@189.306,114.96 ; v1(188.951,115.316) v1@189.306,114.96 ; v1(189.306,131.674) v1@189.306,114.96
  Bottom Layer w0.5: v1(188.951,115.316) 189.586,114.681 209.042,114.681 214.351,109.372 215.017,109.372 215.028,109.361 216.706,109.361 216.717,109.372 221.183,109.372 222.555,108.001 222.555,106.21 218.732,106.21 R8.1 ; v1(189.306,131.674) 189.306,132.412 191.181,134.286 195.064,134.286 195.811,135.034 195.811,139.776 195.96,139.925 U1.19
"MotorBat +": D1.1 J3.1 | length 10.4
  Bottom Layer w0.5: D1.1 205.696,166.776 211.069,166.776 J3.1
"NetCAN Term_1": "CAN Term.1" R22.1 | length 17.6
  Top Layer w0.5: 211,103 211.963,102.037 211.963,93.142 212.725,92.38 217.922,92.38 217.962,92.42 R22.1
NetD1_2: D1.2 D7.2 EC1.1 L1.2 | length 48.8
  Top Layer w0.5: L1.2 175,160.58 D7.2
  Bottom Layer w0.5: EC1.1 169.443,152.5 175,146.943 L1.2 ; D7.2 183.42,165 D1.2
NetD2_A: D2.A R9.1 | length 5.8
  Top Layer w0.5: R9.1 216.445,173.525 D2.A
NetD3_A: D3.A R10.1 | length 5.8
  Top Layer w0.5: R10.1 181.92,173.408 D3.A
NetD4_A: D4.A R11.1 | length 5.8
  Top Layer w0.5: R11.1 169.42,173.34 D4.A
NetD5_A: D5.A R12.1 | length 5.8
  Top Layer w0.5: R12.1 160.147,175.227 D5.A
NetD6_A: D6.A R13.1 | length 5.9
  Top Layer w0.5: R13.1 144.42,173.205 D6.A
NetJ1_1: J1.1 L1.1 | length 51.6
  Top Layer w0.5: J1.1 170.415,118.652 170.415,157.524 v1(170.048,157.892)
  Bottom Layer w0.5: v1(170.048,157.892) L1.1
Orange/CANRX: P1.7 R11.2 U1.22 U4.4 | length 209.4
  Top Layer w0.5: U4.4 145.808,88.189 151.663,88.189 153.397,86.456 153.823,86.309 156.312,86.258 156.619,86.199 cw(c156,83) 158.319,85.288 160.636,83.587 160.768,83.49 160.932,83.49 190.49,83.49 v1(190.5,83.5) ; R11.2 179.58,175.262 182.423,178.105 189.687,178.105 192.253,175.539 192.253,174.346 193.294,173.304 193.294,169.215 202.516,159.993 204.851,159.993 204.851,144.531 U1.22 205.971,140.869 205.971,133.627 211.455,128.143 211.455,114.545 v1(215.5,110.5) ; v1(221.5,93) 221.5,105.26 P1.7
  Bottom Layer w0.5: v1(190.5,83.5) 195.224,83.5 195.9,84.176 204.013,84.176 211.356,91.518 216.029,91.518 218.618,94.107 220.393,94.107 v1(221.5,93) ; v1(215.5,110.5) 218.766,110.5 218.984,110.719 222.042,110.719 P1.7
SCL: P1.5 R2.1 U2.5 U3.6 | length 60.2
  Top Layer w0.5: v1(207.994,129.994) 207.994,127.662 208,127.656 v1(208,116) ; R2.1 212.325,133.881 U2.5 ; v1(221.361,145.39) 221.361,149.865 U3.6
  Bottom Layer w0.5: v1(207.994,129.994) 208.141,130.141 208.585,130.141 R2.1 ; v1(208,116) 214.794,116 215.024,116.23 221.61,116.23 P1.5 ; U2.5 213.599,137.279 213.599,139.7 215.885,141.986 217.957,141.986 v1(221.361,145.39)
SDA: P1.4 R1.1 U2.3 U3.5 | length 51.8
  Top Layer w0.5: R1.1 214.865,132.666 U2.3 ; U3.5 224.333,148.595 224.333,145.44 v1(223.063,144.17) ; v1(223.5,129) 223.5,124.713 222.86,124.072 222.86,117.521 P1.4
  Bottom Layer w0.5: R1.1 215.371,133.172 221.615,133.172 223.5,131.287 v1(223.5,129) ; U2.3 216.139,137.279 218.671,137.279 218.671,139.779 v1(223.063,144.17)
"Service Pressure": R20.1 R21.2 U1.15 | length 37.7
  Top Layer w0.5: v1(194.686,140.894) 193.279,139.487 193.279,130.393 195,128.672 R20.1 R21.2
  Bottom Layer w0.5: U1.15 187.066,144.526 194.686,144.526 v1(194.686,140.894)
"Service Pressure IN": J22.19 R20.2 | length 38.4
  Bottom Layer w0.5: J22.19 160.376,130.67 184.246,130.67 185.893,129.023 191.957,129.023 192.989,130.055 192.989,130.888 193.675,131.574 R20.2
"Supply Pressure": R18.1 R19.2 U1.14 | length 50.8
  Top Layer w0.5: U1.14 185.655,140.865 185.655,121.467 186.009,121.114 186.178,121.114 186.792,120.5 v1(187,120.5) ; R19.2 R18.1
  Bottom Layer w0.5: v1(187,120.5) 189.116,118.384 189.116,117.716 191.084,115.748 204.438,115.748 R19.2
"Supply Pressure IN": J22.22 R18.2 | length 60.8
  Bottom Layer w0.5: J22.22 170.716,144.391 173.787,141.32 175.534,141.32 178.744,144.53 184.912,144.53 185.67,145.288 199.009,145.288 199.771,144.526 199.771,141.049 200.891,139.929 200.891,134.62 201.805,133.706 204.132,133.706 R18.2
"SwitchedBat +": D7.1 J12.2 | length 99.6
  Top Layer w0.5: D7.1 172.959,156.621 172.959,116.012 170.129,113.182 170.129,92.989 170.738,92.381 187.535,92.381 J12.2
"UART-RX from Teensy": U1.0 U2.8 | length 20.5
  Top Layer w0.5: U2.8 209.785,141.808 209.931,141.954 209.931,155.753 211.2,157.022 U1.0
"UART-TX from Teensy": U1.1 U2.10 | length 20.5
  Top Layer w0.5: U2.10 207.245,141.84 207.391,141.986 v1(207.391,148.617)
  Bottom Layer w0.5: v1(207.391,148.617) 208.66,149.886 U1.1
Yellow/CANTX: P1.6 R12.2 U1.23 U4.1 | length 319.6
  Top Layer w0.5: U4.1 141.986,92 141.986,174.981 144.78,177.775 147.505,177.775 148.243,178.512 163.093,178.512 167.08,174.525 R12.2 ; U1.23 206.12,153.11 209.931,156.921 209.931,170.84 215.367,176.276 220.345,176.276 225.349,171.272 225.349,143.027 223.215,140.894 219.71,140.894 218.671,139.855 218.671,133.325 218.732,133.264 218.732,115.732 v1(217.5,114.5)
  Bottom Layer w0.5: R12.2 159.452,172 156.362,168.91 156.362,165.1 157.302,164.16 178.283,164.16 181.638,160.805 190.5,160.805 192.151,159.154 192.151,157.201 196.68,157.201 207.649,146.232 208.475,146.232 209.927,144.78 209.927,141.986 207.394,141.986 U1.23 ; v1(217.5,114.5) 218.679,113.321 218.679,112.842 219.71,111.811 223.489,111.811 P1.6
pads on no net: J1.5 J2.0 J3.0 J4.0 J8.0 J12.0 J22.0 U1.12 U1.CRX3 U1.CTX3 U1.D+ U1.D- U1.On U1.P U1.VBat U1.VUSB U2.1 U2.7 U2.11 U2.12 U2.13 U2.15 U2.16 U2.17 U2.18 U2.19 U2.21 U2.22 U2.23 U2.24 U2.26 U2.27 U2.28 U2.29 U2.31 U2.32 U2.33 U2.35 U2.36 U2.37 U2.38 U2.40 U2.S1 U2.S2 U2.S3 U2.S4 U3.1 U3.2 U3.3 U3.7

## Polygon pours and split planes (outlines as drawn)
GND on Top Layer "GND_L01_P000" (solid, pour order 0): 139.5,84.5 139.5,175.5 cw(c143.5,175.5) 143.5,179.5 191.5,179.5 cw(c191.5,178.5) 192.5,178.5 ccw(c202,178.5) 211.5,178.5 cw(c212.5,178.5) 212.5,179.5 222,179.5 cw(c222,175.5) 226,175.5 226,84.504 225.996,84.504 cw(c221.996,84.504) 221.996,80.504 221.996,80.5 143.5,80.5 cw(c143.5,84.5)
GND on Bottom Layer "GND_L01_P001" (solid, pour order 1): 139.5,84.5 139.5,175.5 cw(c143.5,175.5) 143.5,179.5 191.5,179.5 cw(c191.5,178.5) 192.5,178.5 ccw(c202,178.5) 211.5,178.5 cw(c212.5,178.5) 212.5,179.5 222,179.5 cw(c222,175.5) 226,175.5 226,84.504 225.996,84.504 cw(c221.996,84.504) 221.996,80.504 221.996,80.5 143.5,80.5 cw(c143.5,84.5)

## Keep-outs
Keep-Out Layer:
  lines w0.254: 221.996,80.5 143.5,80.5 cw(c143.5,84.5) 139.5,84.5 139.5,175.5 cw(c143.5,175.5) 143.5,179.5 191.5,179.5 cw(c191.5,178.5) 192.5,178.5 ccw(c202,178.5) 211.5,178.5 cw(c212.5,178.5) 212.5,179.5 222,179.5 cw(c222,175.5) 226,175.5 226,84.504 ; 221.996,80.504 ccw(c221.996,84.504) 225.996,84.504

## Silkscreen, mask and mechanical layers (free items; w line width, h text height)
Top Overlay:
  text "Delta Regulator" at 166.754,122.762 h1.52
  text "GND" at 221.254,102.254 h1.52
  text "CAN" at 222.746,96.254 h1.52 r90
Bottom Overlay:
  text "Brake Chamber Test PCB / Rev 1, June 2022 / Kaushik Varma Rudraraju" at 150.5,139 h1.52 r90
  text "GND" at 222.746,100.254 h1
  text "CANL" at 222.746,97.754 h1
  text "CANH" at 222.746,95.254 h1
Mechanical 1:
  lines w0.254: 98,47 306,47 306,180 98,180 98,47

## Dimensions
222.275,137.275 to 306,180 on Mechanical 1
222.275,137.275 to 306,180 on Mechanical 1
192.5,178.5 to 211.5,178.5 on Mechanical 1
222.275,137.275 to 202,175.5 on Mechanical 1
222.275,137.275 to 220.5,179.5 on Mechanical 1
226,84.504 to 139.5,84.5 on Mechanical 1

## Text inside footprints (layer, text, board x,y; h text height)
EC1: Top Overlay "+" at 164.9,146.15 h1.02 r90; Top Overlay "-" at 165,164.35 h1.02 r90; Bottom Overlay "-" at 163.3,158.75 h1.02 r90; Bottom Overlay "+" at 163.2,152.95 h1.02 r90
EC2: Top Overlay "+" at 148.4,145.9 h1.02 r90; Top Overlay "-" at 148.5,164.1 h1.02 r90; Bottom Overlay "-" at 146.8,158.5 h1.02 r90; Bottom Overlay "+" at 146.7,152.7 h1.02 r90
J2: Top Overlay "Bat+" at 152.025,164.46 h1; Top Overlay "Bat-" at 156.5,164.5 h1
J3: Top Overlay "2" at 208.273,167.54 h1.52 r90; Top Overlay "1" at 213.48,167.54 h1.52 r90
J4: Top Overlay "2" at 151.496,89.665 h1.52; Top Overlay "3" at 159.497,94.999 h1.52; Top Overlay "1" at 159.751,89.665 h1.52
J8: Top Overlay "5" at 215,101 h1.52; Top Overlay "4" at 197.617,93.52 h1.52; Top Overlay "Molex  / 39-30-1080" at 195.5,81.5 h1.52; Top Overlay "8" at 201,101.5 h1.52; Top Overlay "1" at 216.54,93.52 h1.52
J12: Top Overlay "7" at 195.5,97.5 h1.52; Top Overlay "12" at 168.481,98.981 h1.52; Top Overlay "6" at 169.497,93.393 h1.52; Top Overlay "1" at 196.04,93.52 h1.52; Top Overlay "Molex 39-30-0120" at 170.5,90 h1.52
J22: Top Overlay "12" at 158.227,99.851 h1.52 r270; Top Overlay "1" at 153.02,99.851 h1.52 r270; Top Overlay "22" at 158.608,148.746 h1.52 r270; Top Overlay "11" at 153.02,148.111 h1.52 r270; Top Overlay "Molex 39-30-0220" at 148,136.5 h1.52 r270
U1: Top Overlay "On/Off" at 182.117,145.419 h0.76; Top Overlay "Prog." at 182.117,147.959 h0.76; Top Overlay "GND" at 182.117,150.499 h0.76; Top Overlay "3.3V" at 182.117,153.039 h0.76; Top Overlay "Vbat" at 182.117,155.579 h0.76; Top Overlay "D+  D-" at 212.089,153.674 h1.02 r270; Top Overlay "USB" at 210.311,152.658 h1.27 r270; Top Overlay "CAN Rx3 (30)" at 186.943,154.944 h0.76 r270; Top Overlay "CAN Tx3 (31)" at 188.848,154.944 h0.76 r270; Bottom Overlay "RX5" at 200.659,144.489 h1.02 r270; Bottom Overlay "CANTX1" at 203.072,144.362 h1.02 r270; Bottom Overlay "CANRX1" at 205.612,144.362 h1.02 r270; Bottom Overlay "CANTX 3" at 203.072,150.458 h1.02 r270; Bottom Overlay "CANRX 4" at 200.532,150.458 h1.02 r270; Bottom Overlay "GND" at 213.232,154.521 h1.02 r270; Bottom Overlay "RX1 0" at 210.692,152.659 h1.02 r270; Bottom Overlay "RX2 7" at 192.912,152.49 h1.02 r270; Bottom Overlay "TX2 8" at 190.372,152.49 h1.02 r270; Bottom Overlay "MOSI 11" at 182.752,151.134 h1.02 r270; Bottom Overlay "TX1 1" at 208.152,152.997 h1.02 r270; Bottom Overlay "CS 10" at 185.165,152.531 h1.02 r270; Bottom Overlay "2" at 205.612,156.552 h1.02 r270; Bottom Overlay "5" at 197.992,156.552 h1.02 r270; Bottom Overlay "6" at 195.452,156.552 h1.02 r270; Bottom Overlay "TX5" at 197.992,144.532 h1.02 r270; Bottom Overlay "SDA0" at 192.912,144.532 h1.02 r270; Bottom Overlay "SCL0" at 195.452,144.532 h1.02 r270; Bottom Overlay "16 A2" at 187.832,144.532 h1.02 r270; Bottom Overlay "Vin" at 213.232,144.532 h1.02 r270; Bottom Overlay "17 A3" at 190.372,144.532 h1.02 r270; Bottom Overlay "14 A0" at 182.752,144.532 h1.02 r270; Bottom Overlay "15 A1" at 185.292,144.532 h1.02 r270